# EAGLE board MCU Board V1.2 (EAGLE 6.5.0)

Size 103.81 x 80 mm. Coordinates in mm from the lower left corner, seen from the top.
Outline: 0,0 103.81,0 103.81,80 0,80 0,0
Copper layers (1*16): Top 0.035mm / dielectric 1.5mm / Bottom 0.035mm
Design rules "default": minimum track width 10mil, minimum drill 24mil, track to track 8mil, track to pad 8mil, pad to pad 8mil, via to via 8mil, smd to smd 8mil, copper to edge 40mil, drill to drill 8mil, minimum pad ring 10mil, minimum via ring 8mil, stop-mask expansion 4mil, vias tented up to drill 0mil, thermal gap 10mil

## Footprints (pad centres in the part's own frame; a part is rotated, then mirrored left to right if it is on the bottom)
LED-1206 = smd 1.2 x 1.4: A -1.5,0; C 1.5,0
PANASONIC_D = smd 3 x 1.4: + 2.4,0; - -2.4,0
1206 = smd 1.6 x 1.8: 1 -1.4,0; 2 1.4,0
0805 = smd 0.8 x 1.2: 1 -0.9,0; 2 0.9,0
POWER_JACK_PTH = drill 2.997 pad 4.318: GND 0,7.7; GNDBREAK 4.7,10.7; PWR 0,13.7
2X3 = drill 1.016 pad 1.88 octagon: 1 0,0; 2 0,2.54; 3 2.54,0; 4 2.54,2.54; 5 5.08,0; 6 5.08,2.54
1X03 = drill 1.016 pad 1.88: 1 0,0; 2 2.54,0; 3 5.08,0
1X02 = drill 1.016 pad 1.88: 1 0,0; 2 2.54,0
0603-ARV = smd 0.5 x 0.65: 1 -1.2,-0.625; 2 -0.4,-0.625; 3 0.4,-0.625; 4 1.2,-0.625; 5 1.2,0.625; 6 0.4,0.625; 7 -0.4,0.625; 8 -1.2,0.625
TC26H = drill 0.813 pad 1.676: 1 -1.27,0; 2 1.27,0
BUZZER-12MM-NS = drill 0.9: + 3.25,0; - -3.25,0
LCD-16X2_NOSILK = drill 1.016 pad 1.88 square: 1 -32,15.5 | drill 1.016 pad 1.88: 2 -29.46,15.5; 3 -26.92,15.5; 4 -24.38,15.5; 5 -21.84,15.5; 6 -19.3,15.5; 7 -16.76,15.5; 8 -14.22,15.5; 9 -11.68,15.5; 10 -9.14,15.5; 11 -6.6,15.5; 12 -4.06,15.5; 13 -1.52,15.5; 14 1.02,15.5; 15 3.56,15.5; 16 6.1,15.5 | hole 2.8: -37.5,15.5; -37.5,-15.5; 37.5,15.5; 37.5,-15.5
TQFP44 = smd 1.5 x 0.5: 1 -5.8,4; 2 -5.8,3.2; 3 -5.8,2.4; 4 -5.8,1.6; 5 -5.8,0.8; 6 -5.8,0; 7 -5.8,-0.8; 8 -5.8,-1.6; 9 -5.8,-2.4; 10 -5.8,-3.2; 11 -5.8,-4; 23 5.8,-4; 24 5.8,-3.2; 25 5.8,-2.4; 26 5.8,-1.6; 27 5.8,-0.8; 28 5.8,0; 29 5.8,0.8; 30 5.8,1.6; 31 5.8,2.4; 32 5.8,3.2; 33 5.8,4 | smd 0.5 x 1.5: 12 -4,-5.8; 13 -3.2,-5.8; 14 -2.4,-5.8; 15 -1.6,-5.8; 16 -0.8,-5.8; 17 0,-5.8; 18 0.8,-5.8; 19 1.6,-5.8; 20 2.4,-5.8; 21 3.2,-5.8; 22 4,-5.8; 34 4,5.8; 35 3.2,5.8; 36 2.4,5.8; 37 1.6,5.8; 38 0.8,5.8; 39 0,5.8; 40 -0.8,5.8; 41 -1.6,5.8; 42 -2.4,5.8; 43 -3.2,5.8; 44 -4,5.8
2X5-SHROUDED = drill 1.016 pad 1.88 octagon: 1 -1.27,5.08; 2 1.27,5.08; 3 -1.27,2.54; 4 1.27,2.54; 5 -1.27,0; 6 1.27,0; 7 -1.27,-2.54; 8 1.27,-2.54; 9 -1.27,-5.08; 10 1.27,-5.08
TRIM_POT = drill 1 pad 1.88: 1 5.08,0; 2 0,2.54; 3 0,-2.54
XBEE-SILK = drill 0.8 pad 1.524: 1 -11,20; 2 -11,18; 3 -11,16; 4 -11,14; 5 -11,12; 6 -11,10; 7 -11,8; 8 -11,6; 9 -11,4; 10 -11,2; 11 11,2; 12 11,4; 13 11,6; 14 11,8; 15 11,10; 16 11,12; 17 11,14; 18 11,16; 19 11,18; 20 11,20
DPAK = smd 1.6 x 3: 1 -2.28,-5.31; 3 2.28,-5.31 | smd 4.826 x 5.715: 4 0,1.588
SOT223 = smd 1.219 x 2.235: 1 -2.311,-3.099; 2 0,-3.099; 3 2.311,-3.099 | smd 3.6 x 2.2: 4 0,3.099
HC49US = drill 0.7 pad 1.651: 1 -2.54,0; 2 2.54,0

## Placement (x,y rotation side)
3.3V_LED  [LED-1206]  82.55,71.12 90 top
5V_LED  [LED-1206]  71.12,76.2 0 top
C1  100uF  [PANASONIC_D]  48.26,69.85 270 top
C2  100uF  [PANASONIC_D]  67.31,69.85 270 top
C3  10uF  [1206]  80.01,71.12 270 top
C4  10uF  [1206]  60.96,69.85 270 top
C5  22pf  [0805]  36.83,63.5 180 top
C6  22pf  [0805]  36.83,68.58 180 top
C7  12pf  [0805]  55.88,57.15 90 top
C8  12pf  [0805]  53.34,57.15 90 top
J1  POWER_JACKPTH  [POWER_JACK_PTH]  83.82,57.15 90 top
J2  AVR_SPI_PRG_6PTH  [2X3]  76.2,33.02 90 top
JP1  [1X03]  5.08,59.69 270 top
JP2  M02PTH  [1X02]  5.08,66.04 90 top
R1  1k  [1206]  64.77,76.2 180 top
R2  1k  [1206]  82.55,64.77 270 top
R3  10k  [0603-ARV]  59.69,41.91 0 top
R4  10k  [0603-ARV]  55.88,24.13 0 top
R5  [1206]  10.16,66.04 0 top
REAL_TIME  32khz  [TC26H]  54.61,52.07 180 top
SG1  BUZZERNS  [BUZZER-12MM-NS]  21.59,67.31 0 top
U1  LCD-16X2NOSILK  [LCD-16X2_NOSILK]  44.45,60.96 0 top
U$1  ATMEGA1284  [TQFP44]  44.45,57.15 0 top
U$2  10PIN_HEADER_MALETHROUGH-HOLE  [2X5-SHROUDED]  55.88,35.56 90 top
U$3  10k  [TRIM_POT]  6.35,35.56 270 top
U$4  XBEE-1B2  [XBEE-SILK]  22.86,53.34 180 top
U$5  DPACK_V_REG  [DPAK]  55.88,69.85 0 top
U$6  POWERIC223  [SOT223]  74.93,69.85 0 top
Y1  18.432  [HC49US]  31.75,66.04 270 top

## Library data of the parts
3.3V_LED 5V_LED = SparkFun-LED
C1-C6 = SparkFun-Capacitors
C7 C8 = SparkFun-Passives
J1 J2 JP1 JP2 = SparkFun-Connectors
R1-R5 = SparkFun-Resistors
REAL_TIME Y1 = SparkFun-FreqCtrl
SG1 U$3 = SparkFun-Electromechanical
U1 = SparkFun-Displays
U$1 U$2 U$5 U$6 = NU STEM
U$4 = SparkFun-RF

## Nets
3.3V: C3.2 R2.2 U$4.1 U$6.3
5V: C2.+ C4.2 J2.2 JP1.2 R1.2 R5.2 U1.2 U1.15 U$1.5 U$1.17 U$1.38 U$2.9 U$2.10 U$3.3 U$5.3 U$6.1
ADD_DEVICE: R3.3 U$1.16 U$2.6
ALARM_PWM: SG1.+ U$1.43
BACK: U$1.24
DIN: U$1.9 U$4.3
DOUT: U$1.10 U$4.2
EDIT_DEVICE: R3.4 U$1.15 U$2.8
ENTER: R4.6 U$1.23 U$2.5
GND: 3.3V_LED.C 5V_LED.C C1.- C2.- C3.1 C4.1 C5.1 C6.1 C7.2 C8.2 J1.GND J2.6 JP1.1 JP2.2 R3.5 R3.6 R3.7 R3.8 R4.1 R4.2 R4.3 R4.4 SG1.- U1.1 U1.16 U$1.6 U$1.18 U$1.28 U$1.39 U$3.2 U$4.10 U$5.4 U$6.2 U$6.4
LIGHT_SENSOR: JP2.1 R5.1 U$1.30
MISO/DOWN: J2.1 R4.7 U$1.2 U$2.3
MOSI/LEFT: J2.4 R3.2 U$1.1 U$2.4
N$1: C7.1 REAL_TIME.1 U$1.26
N$2: C5.2 U$1.7 Y1.2
N$3: C6.2 U$1.8 Y1.1
N$4: C8.1 REAL_TIME.2 U$1.25
N$5: 5V_LED.A R1.1
N$6: 3.3V_LED.A R2.1
N$7: U1.7 U$1.37
N$8: U1.9 U$1.36
N$9: U1.8 U$1.35
N$10: U1.10 U$1.34
N$11: U1.6 U$1.33
N$12: U1.5 U$1.32
N$13: U1.4 U$1.31
N$14: U1.11 U$1.19
N$15: U1.12 U$1.20
N$16: U1.13 U$1.21
N$17: U1.14 U$1.22
PWR: C1.+ J1.PWR U$5.1
RESET: J2.5 U$1.4
RETURN: R4.5 U$2.7
RIGHT: R3.1 U$1.44 U$2.2
SCK/UP: J2.3 R4.8 U$1.3 U$2.1
VO: U1.3 U$3.1
WHITE: JP1.3

## Tracks (layer width: path | path; a pad name or v marks a point on that pad's centre or on a via)
3.3V  (3 unrouted)
5V  (15 unrouted)
ADD_DEVICE  (2 unrouted)
ALARM_PWM  (1 unrouted)
DIN  (1 unrouted)
DOUT  (1 unrouted)
EDIT_DEVICE  (2 unrouted)
ENTER  (2 unrouted)
GND  (33 unrouted)
LIGHT_SENSOR  (2 unrouted)
MISO/DOWN  (3 unrouted)
MOSI/LEFT  (3 unrouted)
N$1  (2 unrouted)
N$2  (2 unrouted)
N$3  (2 unrouted)
N$4  (2 unrouted)
N$5  (1 unrouted)
N$6  (1 unrouted)
N$7  (1 unrouted)
N$8  (1 unrouted)
N$9  (1 unrouted)
N$10  (1 unrouted)
N$11  (1 unrouted)
N$12  (1 unrouted)
N$13  (1 unrouted)
N$14  (1 unrouted)
N$15  (1 unrouted)
N$16  (1 unrouted)
N$17  (1 unrouted)
PWR  (2 unrouted)
RESET  (1 unrouted)
RETURN  (1 unrouted)
RIGHT  (2 unrouted)
SCK/UP  (3 unrouted)
VO  (1 unrouted)